# Altium PCB Power Board rev5.PcbDoc (part 2 of 2)
Units mil, origin at the board's own origin, x right, y up, seen from the top; angles counter-clockwise.
Board outline 3457.32 x 5639.92 mil, 2 copper layers (Top Layer, Bottom Layer); 95 components, 85 nets, 338 pads, 132 vias.
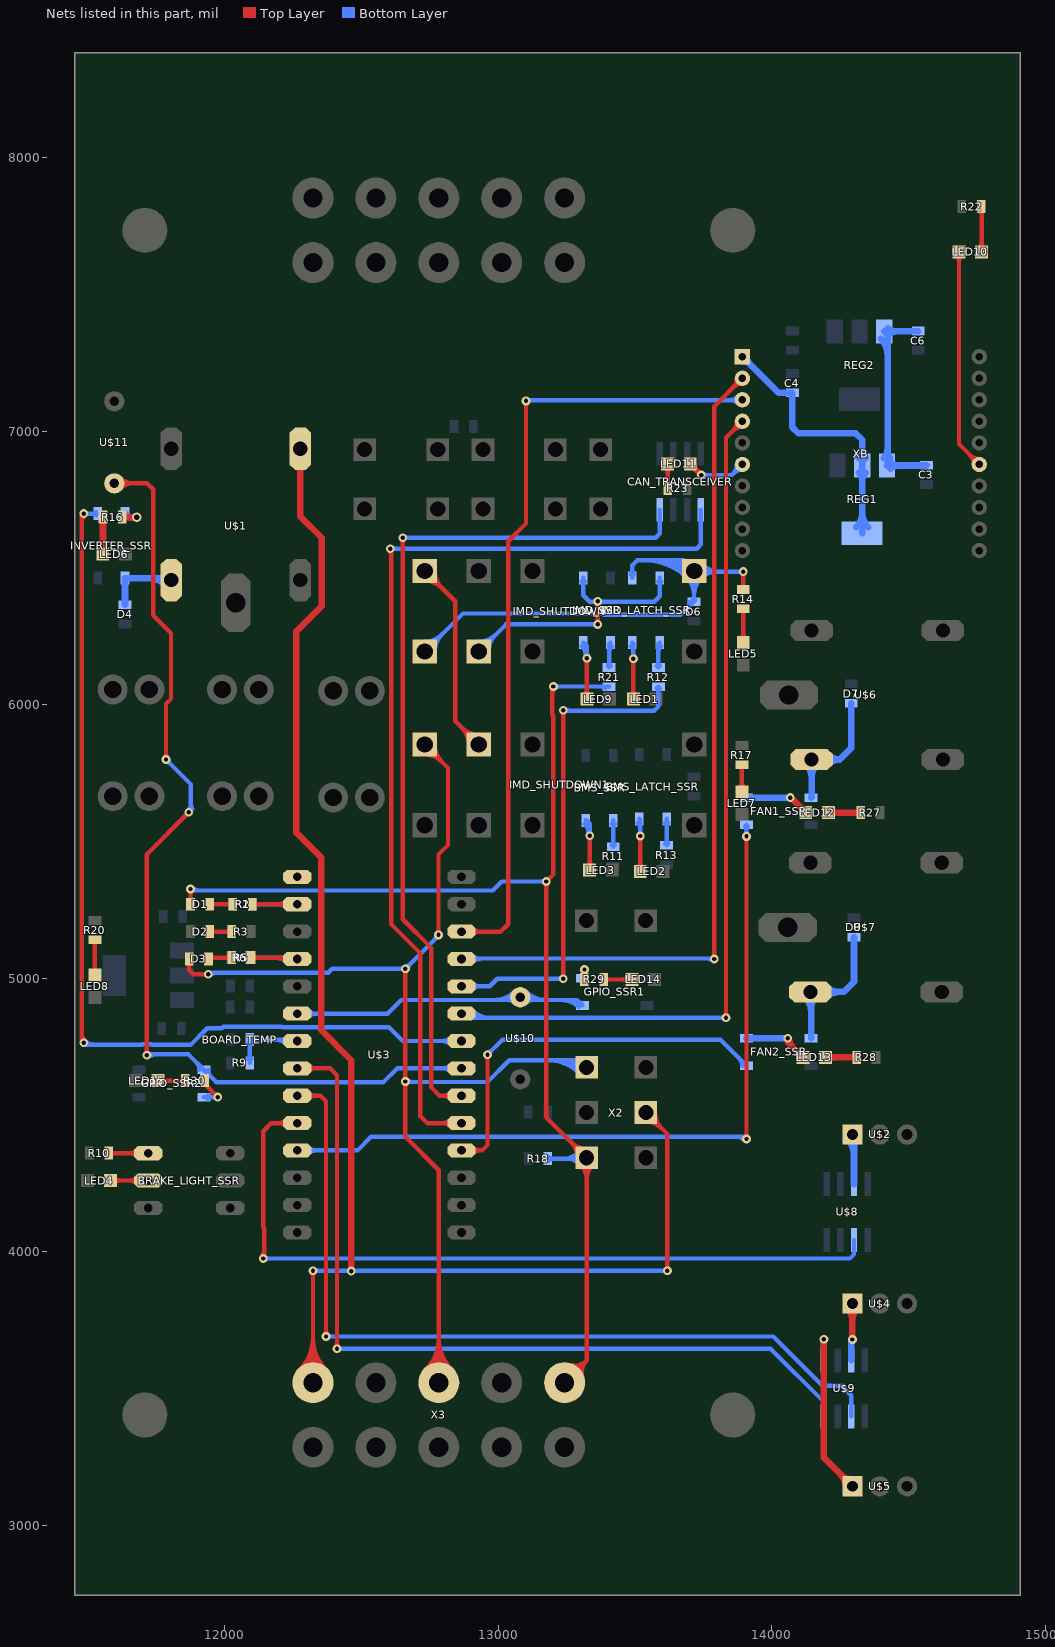
[diagram p2: the nets of this part, all layers, seen from the top]

## Via types
v1: diameter 32, hole 16, Top Layer to Bottom Layer, 87 vias
v2: diameter 40, hole 20, Top Layer to Bottom Layer, 41 vias
v3: diameter 35, hole 20, Top Layer to Bottom Layer, 4 vias

## Nets (pads, with @x,y where several pads share a name; then routed paths per layer and width w, separated by ;. In a path a pad name is that pad's centre, name@x,y a point inside that pad or via, vN(x,y) a via of type N, cw(c..) or ccw(c..) an arc to the next point about the centre after c; other vN are vias at no path point) (continued)
GPIO_CTRL1: GPIO_SSR1.1 U$3.A4 U$10.P$1 | length 1586.8
  Bottom Layer w16: U$3.A4@12265,4870 12595,4870 12645,4920 13286.89,4920 ; U$3.A4@12303.3,4857.45 cw(c12333.6,4827.15) 12333.6,4870 cw(c12333.6,4912.85) U$3.A4@12303.3,4882.55 ; 12985.85,4920 ccw(c12985.85,5024.15) U$10.P$1@13059.49,4950.51 ; 13024.47,4920 ccw(c13024.47,4985.53) U$10.P$1@13070.81,4939.19 ; 13034.13,4920 cw(c13034.13,4884.13) U$10.P$1@13059.49,4909.49 ; U$10.P$1@13089.19,4939.19 ccw(c13135.53,4985.53) 13135.53,4920 ; U$10.P$1@13100.51,4909.49 cw(c13125.87,4884.13) 13125.87,4920 ; U$10.P$1@13100.51,4950.51 ccw(c13174.15,5024.15) 13174.15,4920 ; 13232.03,4920 cw(c13232.03,4833.01) GPIO_SSR1.1@13293.54,4894.52 ; 13270.65,4920 cw(c13270.65,4871.64) GPIO_SSR1.1@13304.85,4905.84 ; GPIO_SSR1.1@13291.56,4902.1 ccw(c13273.96,4907.07) 13286.89,4920 ; GPIO_SSR1.1@13306.89,4900 13286.89,4920
GPIO_CTRL2: GPIO_SSR2.1 U$3.D5 U$11.P$1 | length 3991.3
  Top Layer w16: U$11.P$1@11595.95,6808.55 11716.45,6808.55 11738,6787 11738,6326 11803,6261 11803,6020.73 11785,6002.73 v1(11785,5799) ; U$11.P$1@11616.46,6788.04 cw(c11665.96,6738.54) 11665.96,6808.55 cw(c11665.96,6878.56) U$11.P$1@11616.46,6829.06 ; v1@11709.34,4723.66 ccw(c11695.69,4737.31) 11715,4737.31 ccw(c11734.31,4737.31) v1@11720.66,4723.66 ; v1(11715,4718) 11715,5453 v1(11868,5606) ; v1@11779.34,5804.66 ccw(c11765.69,5818.31) 11785,5818.31 ccw(c11804.31,5818.31) v1@11790.66,5804.66 ; v1@11868,5614 cw(c11848.69,5614) 11862.34,5600.34 cw(c11876,5586.69) v1@11876,5606
  Bottom Layer w16: v1(11715,4718) 11718,4721 11867.11,4721 GPIO_SSR2.1@11923.11,4665 11968.36,4619.75 12579.75,4619.75 12630,4670 U$3.D5@12865,4670 ; v1@11720.66,4712.34 cw(c11734.31,4698.69) 11734.31,4718 cw(c11734.31,4737.31) v1@11720.66,4723.66 ; v1@11785,5791 cw(c11785,5771.69) 11798.66,5785.34 cw(c11812.31,5799) v1@11793,5799 ; v1(11785,5799) 11876,5708 11876,5614 v1(11868,5606) ; v1@11870.34,5619.66 ccw(c11856.69,5633.31) 11876,5633.31 ccw(c11895.31,5633.31) 11881.66,5619.66 ; 11896.44,4691.67 cw(c11869.77,4665) GPIO_SSR2.1@11907.49,4665 ; GPIO_SSR2.1@11938.73,4665 ccw(c11976.45,4665) 11949.78,4638.33 ; U$3.D5@12826.7,4657.45 ccw(c12796.4,4627.15) 12796.4,4670 ccw(c12796.4,4712.85) U$3.D5@12826.7,4682.55
GPIO_CTRL3: U$3.D13
IMD_COIL_PWR: D6.C IMD_LATCH_SSR.3 IMD_SHUTDOWN.4 IMD_SHUTDOWN.COIL- R14.1 | length 3009.5
  Top Layer w16: v1@13889.34,6480.34 cw(c13875.69,6466.69) 13895,6466.69 cw(c13914.31,6466.69) v1@13900.66,6480.34 ; R14.1@13889.52,6425.91 ccw(c13876.29,6439.14) 13895,6439.14 ccw(c13913.71,6439.14) R14.1@13900.48,6425.91 ; R14.1@13895,6420.43 v1(13895,6486)
  Bottom Layer w16: IMD_SHUTDOWN.4@12730.95,6193.55 12870.4,6333 13379.57,6333 13384.57,6328 13665.13,6328 13712.56,6375.43 D6.C@13715,6375.43 13715,6487.6 IMD_SHUTDOWN.COIL-@13715.95,6488.55 ; IMD_SHUTDOWN.4@12730.95,6213.84 ccw(c12730.95,6262.83) 12765.59,6228.19 ccw(c12800.23,6193.55) IMD_SHUTDOWN.4@12751.24,6193.55 ; IMD_SHUTDOWN.4@12730.95,6229.84 ccw(c12730.95,6317.46) 12792.9,6255.5 ccw(c12854.86,6193.55) IMD_SHUTDOWN.4@12767.24,6193.55 ; IMD_LATCH_SSR.3@13484.52,6476.46 ccw(c13471.29,6489.69) 13490,6489.69 ccw(c13508.71,6489.69) IMD_LATCH_SSR.3@13495.48,6476.46 ; IMD_LATCH_SSR.3@13490,6463.11 13490,6509 13508,6527 13677.5,6527 IMD_SHUTDOWN.COIL-@13715.95,6488.55 ; 13535.51,6527 cw(c13535.51,6308.11) 13690.29,6462.89 cw(c13630.63,6403.23) 13715,6403.23 ; 13574.14,6527 cw(c13574.14,6346.74) 13701.6,6474.2 cw(c13669.26,6441.86) 13715,6441.86 ; 13612.76,6527 cw(c13612.76,6385.36) IMD_SHUTDOWN.COIL-@13712.92,6485.52 ; 13651.39,6527 cw(c13651.39,6423.99) IMD_SHUTDOWN.COIL-@13724.23,6496.83 ; 13690.06,6352.93 ccw(c13667.56,6375.43) D6.C@13699.38,6375.43 ; D6.C@13709.52,6380.91 ccw(c13696.29,6394.14) 13715,6394.14 ccw(c13733.71,6394.14) D6.C@13720.48,6380.91 ; 13715,6398.64 cw(c13805.86,6398.64) 13741.61,6462.89 cw(c13797.41,6407.09) 13797.41,6486 ; 13715,6437.27 cw(c13767.23,6437.27) IMD_SHUTDOWN.COIL-@13730.3,6474.2 ; IMD_SHUTDOWN.COIL-@13730.3,6502.9 ccw(c13771.09,6543.69) 13771.09,6486 ; IMD_SHUTDOWN.COIL-@13741.61,6514.21 ccw(c13809.72,6582.32) 13809.72,6486 ; v1@13889.34,6480.34 ccw(c13875.69,6466.69) 13875.69,6486 ccw(c13875.69,6505.31) v1@13889.34,6491.66 ; v1(13895,6486) 13718.5,6486 IMD_SHUTDOWN.COIL-@13715.95,6488.55
IMD_LATCH_CTRL: R12.2 U$3.D8(TX3) | length 2066.7
  Top Layer w16: v1@13231.34,5003.66 ccw(c13217.69,5017.31) 13237,5017.31 ccw(c13256.31,5017.31) v1@13242.66,5003.66 ; v1@13231.34,5973.34 cw(c13217.69,5959.69) 13237,5959.69 cw(c13256.31,5959.69) v1@13242.66,5973.34 ; v1(13237,4998) v1(13237,5979)
  Bottom Layer w16: 12865,4970 12968,4970 12996,4998 v1(13237,4998) ; 12903.3,4957.45 cw(c12933.6,4927.15) 12933.6,4970 cw(c12933.6,5012.85) 12903.3,4982.55 ; v1@13231.34,4992.34 ccw(c13217.69,4978.69) 13217.69,4998 ccw(c13217.69,5017.31) v1@13231.34,5003.66 ; v1(13237,5979) 13256,5979 ; v1@13242.66,5984.66 ccw(c13258.73,6000.73) 13258.73,5978 ; v1@13242.72,5973.41 cw(c13256,5960.44) 13256,5979 ; v1@13242.72,5984.59 ccw(c13256,5997.56) 13256,5979 ; v1@13242.99,5984.31 ccw(c13257,5996.72) 13257,5978 ; R12.2@13579.52,6059.09 cw(c13566.29,6045.86) 13585,6045.86 cw(c13603.71,6045.86) R12.2@13590.48,6059.09 ; R12.2@13585,6064.57 13585,5993 13570,5978 13257,5978 ; 13256,5979 13257,5978 ; v1@13242.66,5973.34 cw(c13253.9,5962.1) 13253.9,5978 ccw(c13253.9,5962.1) v1@13242.66,5973.34
IMD_PWR_STEP: IMD_LATCH_SSR.4 IMD_SHUTDOWN.3 IMD_SSR.3 | length 1413.7
  Top Layer w16: v1@13357.34,6298.66 ccw(c13343.69,6312.31) 13363,6312.31 ccw(c13382.31,6312.31) v1@13368.66,6298.66 ; v1@13357.34,6371.34 cw(c13343.69,6357.69) 13363,6357.69 cw(c13382.31,6357.69) v1@13368.66,6371.34 ; v1(13363,6293) v1(13363,6377)
  Bottom Layer w16: IMD_SHUTDOWN.3@12927.95,6193.55 13027.4,6293 v1(13363,6293) ; IMD_SHUTDOWN.3@12927.95,6213.84 ccw(c12927.95,6262.83) 12962.59,6228.19 ccw(c12997.23,6193.55) IMD_SHUTDOWN.3@12948.24,6193.55 ; IMD_SHUTDOWN.3@12927.95,6229.84 ccw(c12927.95,6317.46) 12989.9,6255.5 ccw(c13051.86,6193.55) IMD_SHUTDOWN.3@12964.24,6193.55 ; IMD_SSR.3@13304.52,6449.76 cw(c13291.29,6436.53) 13310,6436.53 cw(c13328.71,6436.53) IMD_SSR.3@13315.48,6449.76 ; IMD_SSR.3@13310,6463.11 13310,6400 13334,6376 13570,6376 13590,6396 IMD_LATCH_SSR.4@13590,6463.11 ; 13341.27,6376 ccw(c13341.27,6398.73) v1@13357.34,6382.66 ; 13346.1,6376 cw(c13346.1,6360.1) v1@13357.34,6371.34 ; v1@13357.34,6287.34 ccw(c13343.69,6273.69) 13343.69,6293 ccw(c13343.69,6312.31) v1@13357.34,6298.66 ; v1@13368.66,6371.34 cw(c13379.9,6360.1) 13379.9,6376 ; v1@13368.66,6382.66 ccw(c13384.73,6398.73) 13384.73,6376 ; IMD_LATCH_SSR.4@13584.52,6449.76 cw(c13571.29,6436.53) 13590,6436.53 cw(c13608.71,6436.53) IMD_LATCH_SSR.4@13595.48,6449.76
INVERTER_CTRL: INVERTER_SSR.1 U$3.D6 | length 3655.2
  Top Layer w16: 11477.38,4799.3 ccw(c11519.3,4799.3) v1@11489.66,4769.66 ; 11477.38,6662.7 cw(c11519.3,6662.7) v1@11489.66,6692.34 ; v1(11484,4764) 11477.38,4770.62 11477.38,6691.38 v1(11484,6698)
  Bottom Layer w16: v1(11484,4764) 11484,4757 11697.43,4757 11698.43,4758 11731.57,4758 11732.57,4757 11876,4757 11936,4817 11988.26,4817 11993.88,4822.62 12207.84,4822.62 12210.21,4820.25 12599.75,4820.25 12650,4770 U$3.D6@12865,4770 ; v1(11484,6698) 11484.11,6698.11 INVERTER_SSR.1@11535,6698.11 ; v1@11489.66,4769.66 ccw(c11520.21,4800.21) 11520.21,4757 ; v1@11489.66,6692.34 cw(c11503.58,6678.42) 11503.58,6698.11 ; v1@11489.66,6703.66 ccw(c11503.05,6717.05) 11503.05,6698.11 ; INVERTER_SSR.1@11529.52,6692.63 ccw(c11516.29,6679.4) 11516.29,6698.11 ccw(c11516.29,6716.82) INVERTER_SSR.1@11529.52,6703.59 ; U$3.D6@12826.7,4757.45 ccw(c12796.4,4727.15) 12796.4,4770 ccw(c12796.4,4812.85) U$3.D6@12826.7,4782.55
INVERTER_SUPPLY: U$1.S X2.5 X3.5 | length 6369.9
  Top Layer w16: X3.5@12274.67,3568.38 ccw(c12160.3,3682.75) 12322.05,3682.75 ccw(c12483.8,3682.75) X3.5@12369.43,3568.38 ; X3.5@12285.99,3557.06 ccw(c12198.93,3644.12) 12322.05,3644.12 ccw(c12445.17,3644.12) X3.5@12358.11,3557.06 ; X3.5@12297.3,3545.75 ccw(c12237.55,3605.5) 12322.05,3605.5 ccw(c12406.55,3605.5) X3.5@12346.8,3545.75 ; v1@12316.39,3924.39 cw(c12302.74,3910.74) 12322.05,3910.74 cw(c12341.36,3910.74) v1@12327.71,3924.39 ; X3.5@12322.05,3521 v1(12322.05,3930.05) ; X2.5@13539.22,4475.21 cw(c13539.22,4394.72) 13596.13,4451.64 cw(c13653.05,4508.55) X2.5@13572.56,4508.55 ; X2.5@13539.22,4491.21 cw(c13539.22,4449.35) 13568.82,4478.95 cw(c13598.42,4508.55) X2.5@13556.56,4508.55 ; X2.5@13539.22,4508.55 13617.95,4429.82 v1(13617.95,3930.05) ; v1@13612.29,3935.71 ccw(c13598.64,3949.36) 13617.95,3949.36 ccw(c13637.26,3949.36) v1@13623.61,3935.71
  Top Layer w24: U$1.S@12276,6935 12276,6688 12354,6610 12354,6360.33 12261,6267.33 12261,5532 12353,5440 12353,4809 12462,4700 v1(12462,3929)
  Bottom Layer w16: v1(12322.05,3930.05) v1(13617.95,3930.05) ; v1@12327.71,3924.39 cw(c12341.36,3910.74) 12341.36,3930.05 cw(c12341.36,3949.36) v1@12327.71,3935.71 ; v1@13612.29,3924.39 ccw(c13598.64,3910.74) 13598.64,3930.05 ccw(c13598.64,3949.36) v1@13612.29,3935.71
N$1: IMD_LATCH_SSR.2 LED1.A | length 352.8
  Top Layer w16: LED1.A@13482.62,6031.05 ccw(c13455.95,6057.71) 13493.66,6057.71 ccw(c13531.38,6057.71) LED1.A@13504.71,6031.05 ; v1@13488.01,6162.01 cw(c13474.35,6148.35) 13493.66,6148.35 cw(c13512.98,6148.35) v1@13499.32,6162.01 ; LED1.A@13493.66,6020 v1(13493.66,6167.66)
  Bottom Layer w16: IMD_LATCH_SSR.2@13484.52,6213.54 cw(c13462.45,6191.47) 13493.66,6191.47 ; v1@13488.01,6173.32 ccw(c13474.35,6186.98) 13493.66,6186.98 ccw(c13512.98,6186.98) v1@13499.32,6173.32 ; IMD_LATCH_SSR.2@13490,6226.89 13493.66,6223.23 v1(13493.66,6167.66)
N$2: CAN_TRANSCEIVER.4 U$3.D4(CANRX) | length 3337.8
  Top Layer w16: v1@12644.34,6604.34 cw(c12630.69,6590.69) 12650,6590.69 cw(c12669.31,6590.69) v1@12655.66,6604.34 ; v1(12650,6610) 12650,5215 12755,5110 12755,4600 12785,4570 12865,4570 ; 12826.7,4557.45 ccw(c12796.4,4527.15) 12796.4,4570 ccw(c12796.4,4612.85) 12826.7,4582.55
  Bottom Layer w16: v1(12650,6610) 12650.06,6609.94 13574.94,6609.94 13590,6625 CAN_TRANSCEIVER.4@13590,6712.64 ; v1@12655.66,6604.34 cw(c12669.17,6590.83) 12669.17,6609.94 ; v1@12655.66,6615.66 ccw(c12669.46,6629.46) 12669.46,6609.94
N$3: CAN_TRANSCEIVER.1 U$3.D3(CANTX) | length 3673.3
  Top Layer w16: v1@12599.34,6564.34 cw(c12576.03,6541.03) 12609,6541.03 ; v1(12605,6570) 12609,6566 12609,5196 12715,5090 12715,4495 12740,4470 12865,4470 ; 12826.7,4457.45 ccw(c12796.4,4427.15) 12796.4,4470 ccw(c12796.4,4512.85) 12826.7,4482.55
  Bottom Layer w16: v1(12605,6570) 13725,6570 13740,6585 CAN_TRANSCEIVER.1@13740,6712.64 ; v1@12610.66,6564.34 cw(c12624.31,6550.69) 12624.31,6570 cw(c12624.31,6589.31) v1@12610.66,6575.66
N$4: D7.C FAN1_SSR.3 U$6.2 | length 667.7
  Bottom Layer w24: U$6.2@14125.91,5779.91 cw(c14079.82,5733.82) 14145,5733.82 cw(c14210.18,5733.82) U$6.2@14164.09,5779.91 ; FAN1_SSR.3@14143.11,5660 14145,5661.89 U$6.2@14145,5799 14248,5799 ; U$6.2@14203.34,5780.16 cw(c14248,5736.66) 14248,5799 ; U$6.2@14203.34,5817.84 ccw(c14248,5861.34) 14248,5799 ; D7.C@14290,6004.57 14290,5841 14248,5799
N$5: IMD_LATCH_SSR.1 R12.1 | length 151
  Bottom Layer w16: R12.1@13579.52,6140.91 ccw(c13566.29,6154.14) 13585,6154.14 ccw(c13603.71,6154.14) R12.1@13590.48,6140.91 ; R12.1@13585,6135.43 13585,6221.89 IMD_LATCH_SSR.1@13590,6226.89 ; 13585,6188.24 cw(c13620.78,6188.24) IMD_LATCH_SSR.1@13595.48,6213.54
N$6: GPIO_SSR1.2 R29.1 | length 71.3
  Top Layer w16: R29.1@13314.57,4995 v1(13314.57,5031.57)
  Bottom Layer w16: GPIO_SSR1.2@13306.89,5000 13314.57,5007.68 v1(13314.57,5031.57)
N$7: BRAKE_LIGHT_SSR.2 LED4.A | length 266.2
  Top Layer w16: LED4.A@11581.34,4260 BRAKE_LIGHT_SSR.2@11720,4260 ; LED4.A@11592.38,4248.95 cw(c11619.05,4222.29) 11619.05,4260 cw(c11619.05,4297.71) LED4.A@11592.38,4271.05 ; BRAKE_LIGHT_SSR.2@11681.27,4247.27 ccw(c11650.54,4216.54) 11650.54,4260 ccw(c11650.54,4303.46) BRAKE_LIGHT_SSR.2@11681.27,4272.73
N$8: GPIO_SSR2.2 R30.1 | length 242.5
  Top Layer w16: R30.1@11925.43,4625 11925.43,4613.57 v1(11974,4565) ; R30.1@11933.18,4617.13 ccw(c11960.47,4617.13) 11941.17,4597.83 ; v1@11966,4565 ccw(c11946.69,4565) 11960.34,4578.66 ccw(c11974,4592.31) v1@11974,4573
  Bottom Layer w16: GPIO_SSR2.2@11923.11,4565 v1(11974,4565) ; GPIO_SSR2.2@11936.46,4559.52 cw(c11949.69,4546.29) 11949.69,4565 cw(c11949.69,4583.71) GPIO_SSR2.2@11936.46,4570.48 ; v1@11968.34,4559.34 ccw(c11954.69,4545.69) 11954.69,4565 ccw(c11954.69,4584.31) v1@11968.34,4570.66
N$9: BMS_SSR.2 LED3.A | length 408.9
  Top Layer w16: LED3.A@13322.62,5406.05 ccw(c13295.95,5432.71) 13333.66,5432.71 ccw(c13371.38,5432.71) LED3.A@13344.71,5406.05 ; v1@13328.01,5514.68 cw(c13314.35,5501.02) 13333.66,5501.02 cw(c13352.98,5501.02) v1@13339.32,5514.68 ; LED3.A@13333.66,5395 v1(13333.66,5520.34)
  Bottom Layer w16: BMS_SSR.2@13314.61,5563.45 cw(c13271.01,5518.46) v1@13333.66,5518.46 ; BMS_SSR.2@13320,5576.89 13333.66,5563.23 v1(13333.66,5520.34) ; BMS_SSR.2@13325.74,5574.94 cw(c13307.62,5556.24) BMS_SSR.2@13333.66,5556.24 ; v1@13326.73,5524.34 ccw(c13311.45,5533.16) 13328.5,5537.73 ; 13327.89,5540 ccw(c13348.15,5545.43) v1@13337.66,5527.27 ; v1@13328.01,5525.99 ccw(c13314.35,5539.65) 13333.66,5539.65 ccw(c13352.98,5539.65) v1@13339.32,5525.99
N$10: LED10.A XB.15 | length 943
  Top Layer w16: LED10.A@14672.62,7643.95 cw(c14645.95,7617.29) 14683.66,7617.29 cw(c14721.38,7617.29) LED10.A@14694.71,7643.95 ; LED10.A@14683.66,7655 14683.66,6952.25 XB.15@14758.03,6877.88 ; XB.15@14738.03,6877.88 ccw(c14689.75,6877.88) 14723.89,6912.02 ccw(c14758.03,6946.16) XB.15@14758.03,6897.88
N$11: LED10.C R22.2 | length 254
  Top Layer w16: LED10.C@14755.29,7666.05 ccw(c14728.62,7692.71) 14766.34,7692.71 ccw(c14804.05,7692.71) LED10.C@14777.39,7666.05 ; R22.2@14759.95,7806.65 cw(c14744.53,7791.23) 14766.34,7791.23 ; R22.2@14765.43,7820 14766.34,7819.09 LED10.C@14766.34,7655 ; 14766.34,7795.62 cw(c14781.94,7795.62) R22.2@14770.91,7806.65
N$12: BMS_LATCH_SSR.1 R13.2 | length 155.2
  Bottom Layer w16: R13.2@13609.52,5490.91 ccw(c13596.29,5504.14) 13615,5504.14 ccw(c13633.71,5504.14) R13.2@13620.48,5490.91 ; BMS_LATCH_SSR.1@13609.52,5568.54 cw(c13596.29,5555.31) 13615,5555.31 cw(c13633.71,5555.31) BMS_LATCH_SSR.1@13620.48,5568.54 ; R13.2@13615,5485.43 BMS_LATCH_SSR.1@13615,5581.89
N$13: LED14.A R29.2 | length 191.9
  Top Layer w16: R29.2@13385.43,4995 LED14.A@13488.66,4995 ; R29.2@13390.91,4989.52 cw(c13404.14,4976.29) 13404.14,4995 cw(c13404.14,5013.71) R29.2@13390.91,5000.48 ; LED14.A@13477.62,4983.95 ccw(c13450.95,4957.29) 13450.95,4995 ccw(c13450.95,5032.71) LED14.A@13477.62,5006.05
N$14: LED15.A R30.2 | length 186.9
  Top Layer w16: LED15.A@11756.34,4625 R30.2@11854.57,4625 ; LED15.A@11767.38,4613.95 cw(c11794.05,4587.29) 11794.05,4625 cw(c11794.05,4662.71) LED15.A@11767.38,4636.05 ; R30.2@11849.09,4619.52 ccw(c11835.86,4606.29) 11835.86,4625 ccw(c11835.86,4643.71) R30.2@11849.09,4630.48
N$15: BOARD_TEMP.2 R9.2 U$3.A5 | length 417.1
  Bottom Layer w16: R9.2@12084.95,4703.35 ccw(c12071.72,4716.58) 12090.43,4716.58 ccw(c12109.14,4716.58) R9.2@12095.91,4703.35 ; BOARD_TEMP.2@12084.95,4761.65 cw(c12071.72,4748.42) 12090.43,4748.42 cw(c12109.14,4748.42) BOARD_TEMP.2@12095.91,4761.65 ; R9.2@12090.43,4690 BOARD_TEMP.2@12090.43,4775 12260,4775 U$3.A5@12265,4770 ; BOARD_TEMP.2@12095.91,4769.52 cw(c12109.14,4756.29) 12109.14,4775 cw(c12109.14,4793.71) BOARD_TEMP.2@12095.91,4780.48 ; 12184.33,4775 cw(c12184.33,4715.08) U$3.A5@12226.7,4757.45 ; 12208.48,4775 ccw(c12208.48,4800.78) U$3.A5@12226.7,4782.55
N$16: BMS_LATCH_SSR.2 LED2.A | length 337.8
  Top Layer w16: LED2.A@13507.62,5401.05 ccw(c13480.95,5427.71) 13518.66,5427.71 ccw(c13556.38,5427.71) LED2.A@13529.71,5401.05 ; v1@13513.01,5514.01 cw(c13499.35,5500.35) 13518.66,5500.35 cw(c13537.98,5500.35) v1@13524.32,5514.01 ; LED2.A@13518.66,5390 v1(13518.66,5519.66)
  Bottom Layer w16: BMS_LATCH_SSR.2@13509.52,5568.54 cw(c13487.45,5546.47) 13518.66,5546.47 ; v1@13513.01,5525.32 ccw(c13499.35,5538.98) 13518.66,5538.98 ccw(c13537.98,5538.98) v1@13524.32,5525.32 ; BMS_LATCH_SSR.2@13515,5581.89 13518.66,5578.23 v1(13518.66,5519.66)
N$17: BRAKE_LIGHT_SSR.1 R10.1 | length 242.2
  Top Layer w16: R10.1@11575.43,4360 BRAKE_LIGHT_SSR.1@11720,4360 ; R10.1@11580.91,4354.52 cw(c11594.14,4341.29) 11594.14,4360 cw(c11594.14,4378.71) R10.1@11580.91,4365.48 ; BRAKE_LIGHT_SSR.1@11681.27,4347.27 ccw(c11650.54,4316.54) 11650.54,4360 ccw(c11650.54,4403.46) BRAKE_LIGHT_SSR.1@11681.27,4372.73
N$18: BMS_SSR.1 R11.1 | length 155.2
  Bottom Layer w16: R11.1@13414.52,5485.91 ccw(c13401.29,5499.14) 13420,5499.14 ccw(c13438.71,5499.14) R11.1@13425.48,5485.91 ; BMS_SSR.1@13414.52,5563.54 cw(c13401.29,5550.31) 13420,5550.31 cw(c13438.71,5550.31) BMS_SSR.1@13425.48,5563.54 ; R11.1@13420,5480.43 BMS_SSR.1@13420,5576.89
N$19: LED5.A R14.2 | length 211.9
  Top Layer w16: LED5.A@13883.95,6237.38 ccw(c13857.29,6264.05) 13895,6264.05 ccw(c13932.71,6264.05) LED5.A@13906.05,6237.38 ; R14.2@13889.52,6344.09 cw(c13876.29,6330.86) 13895,6330.86 cw(c13913.71,6330.86) R14.2@13900.48,6344.09 ; LED5.A@13895,6226.34 R14.2@13895,6349.57
N$20: D8.C FAN2_SSR.3 U$7.2 | length 712.7
  Bottom Layer w24: U$7.2@14121.54,4930.27 cw(c14069.46,4878.19) 14143.11,4878.19 ; FAN2_SSR.3@14143.11,4780 14143.11,4946.88 U$7.2@14140.63,4949.36 14262.36,4949.36 14300,4987 D8.C@14300,5149.57 ; 14143.11,4890.16 cw(c14199.83,4890.16) U$7.2@14159.72,4930.27 ; U$7.2@14198.72,4930.27 cw(c14244.81,4884.18) 14244.81,4949.36 cw(c14244.81,5014.54) U$7.2@14198.72,4968.45
N$21: U$5.1 U$9.5 | length 753.4
  Top Layer w24: v1(14190,3680) 14190,3246.39 U$5.1@14294.18,3142.21 ; U$5.1@14269.18,3142.21 ccw(c14208.82,3142.21) 14251.5,3184.89 ccw(c14294.18,3227.57) U$5.1@14294.18,3167.21
  Bottom Layer w24: U$9.5@14190,3602.36 v1(14190,3680)
N$22: D1.C R1.1 | length 142.9
  Top Layer w16: D1.C@11945.43,5270 R1.1@12029.57,5270 ; D1.C@11950.91,5264.52 cw(c11964.14,5251.29) 11964.14,5270 cw(c11964.14,5288.71) D1.C@11950.91,5275.48 ; R1.1@12024.09,5264.52 ccw(c12010.86,5251.29) 12010.86,5270 ccw(c12010.86,5288.71) R1.1@12024.09,5275.48
N$23: D2.C R3.1 | length 137.9
  Top Layer w16: D2.C@11945.43,5170 R3.1@12024.57,5170 ; D2.C@11950.91,5164.52 cw(c11964.14,5151.29) 11964.14,5170 cw(c11964.14,5188.71) D2.C@11950.91,5175.48 ; R3.1@12019.09,5164.52 ccw(c12005.86,5151.29) 12005.86,5170 ccw(c12005.86,5188.71) R3.1@12019.09,5175.48
N$24: D3.C R5.1 | length 130.9
  Top Layer w16: D3.C@11945.43,5075 R5.1@12024.57,5075 ; D3.C@11945.91,5083.35 ccw(c11966.07,5103.52) 11966.07,5075 ; R5.1@12019.09,5069.52 ccw(c12005.86,5056.29) 12005.86,5075 ccw(c12005.86,5093.71) R5.1@12019.09,5080.48
N$25: LED11.A XB.6 | length 513.7
  Top Layer w16: LED11.A@13701.34,6864.38 cw(c13701.34,6826.66) 13728.01,6853.33 cw(c13754.67,6880) LED11.A@13716.96,6880 ; LED11.A@13701.34,6880 v1(13742,6839.34) ; LED11.A@13717.13,6859.61 cw(c13698.73,6827.74) v1@13734.27,6837.27 ; LED11.A@13721.72,6864.21 ccw(c13753.6,6882.61) v1@13744.07,6847.07 ; 13725.45,6854.81 cw(c13716.88,6839.98) v1@13734,6839.54 ; 13726.53,6855.89 ccw(c13741.36,6864.45) v1@13741.8,6847.34 ; v1@13734,6839.34 ccw(c13714.69,6839.34) 13728.34,6852.99 ccw(c13742,6866.65) v1@13742,6847.34
  Bottom Layer w16: v1(13742,6839.34) 13853.35,6839.34 XB.6@13891.89,6877.88 ; v1@13747.66,6833.68 cw(c13761.31,6820.02) 13761.31,6839.34 cw(c13761.31,6858.65) v1@13747.66,6844.99 ; XB.6@13871.89,6877.88 cw(c13823.61,6877.88) 13857.75,6843.74 cw(c13891.89,6809.6) XB.6@13891.89,6857.88
N$26: D4.C INVERTER_SSR.3 U$1.1 | length 370.7
  Bottom Layer w24: D4.C@11635,6365.43 INVERTER_SSR.3@11635,6461.89 11797.11,6461.89 U$1.1@11804,6455 ; 11722.18,6461.89 cw(c11722.18,6373.18) U$1.1@11784.91,6435.91 ; 11755.45,6461.89 ccw(c11755.45,6503.55) U$1.1@11784.91,6474.09
N$27: INVERTER_SSR.2 R16.1 | length 122.1
  Top Layer w24: R16.1@11625.43,6685 v3(11678,6685)
  Bottom Layer w24: INVERTER_SSR.2@11635,6698.11 11648.11,6685 v3(11678,6685) ; INVERTER_SSR.2@11637.65,6692.89 ccw(c11656.69,6711.93) 11656.69,6685
N$28: LED6.A R16.2 | length 178.2
  Top Layer w24: LED6.A@11545.44,6558.22 ccw(c11523.41,6580.25) 11554.57,6580.25 ; LED6.A@11554.57,6550.91 R16.2@11554.57,6685 ; 11554.57,6575.87 ccw(c11579.53,6575.87) LED6.A@11561.88,6558.22
N$29: LED8.A R20.2 | length 128.2
  Top Layer w16: LED8.A@11525,5011.34 R20.2@11525,5139.57
N$30: U$2.1 U$8.7 | length 278.1
  Bottom Layer w24: U$2.1@14276.5,4410.6 cw(c14219.77,4353.87) 14300,4353.87 ; U$2.1@14294.18,4428.28 14300,4422.46 U$8.7@14300,4247.36 ; 14300,4381.98 cw(c14340.48,4381.98) U$2.1@14311.86,4410.6
N$31: IMD_SSR.1 R21.2 | length 151
  Bottom Layer w16: R21.2@13399.52,6140.91 ccw(c13386.29,6154.14) 13405,6154.14 ccw(c13423.71,6154.14) R21.2@13410.48,6140.91 ; R21.2@13405,6135.43 13405,6221.89 IMD_SSR.1@13410,6226.89 ; 13405,6188.24 cw(c13440.78,6188.24) IMD_SSR.1@13415.48,6213.54
N$32: LED7.A R17.2 | length 186.9
  Top Layer w16: LED7.A@13878.95,5692.38 ccw(c13852.29,5719.05) 13890,5719.05 ccw(c13927.71,5719.05) LED7.A@13901.05,5692.38 ; R17.2@13884.52,5774.09 cw(c13871.29,5760.86) 13890,5760.86 cw(c13908.71,5760.86) R17.2@13895.48,5774.09 ; LED7.A@13890,5681.34 R17.2@13890,5779.57
N$33: LED11.C R23.2 | length 179
  Top Layer w16: LED11.C@13607.61,6868.95 cw(c13578.75,6840.09) 13619.57,6840.09 ; R23.2@13614.09,6803.35 ccw(c13600.86,6816.58) 13619.57,6816.58 ccw(c13638.28,6816.58) R23.2@13625.05,6803.35 ; LED11.C@13618.66,6880 13619.57,6879.09 R23.2@13619.57,6790 ; 13619.57,6844.48 cw(c13654.18,6844.48) LED11.C@13629.71,6868.95
N$34: IMD_SSR.2 LED9.A | length 434.6
  Top Layer w16: LED9.A@13312.62,6031.05 ccw(c13285.95,6057.71) 13323.66,6057.71 ccw(c13361.38,6057.71) LED9.A@13334.71,6031.05 ; v1@13318.01,6164.01 cw(c13304.35,6150.35) 13323.66,6150.35 cw(c13342.98,6150.35) v1@13329.32,6164.01 ; LED9.A@13323.66,6020 v1(13323.66,6169.66)
  Bottom Layer w16: IMD_SSR.2@13304.56,6213.5 cw(c13259.47,6167.81) v1@13323.66,6167.81 ; IMD_SSR.2@13310,6226.89 13323.66,6213.23 v1(13323.66,6169.66) ; IMD_SSR.2@13315.8,6224.89 cw(c13297.23,6206.08) IMD_SSR.2@13323.66,6206.08 ; v1@13316.73,6173.66 ccw(c13301.43,6182.5) 13318.5,6187.07 ; 13317.9,6189.31 ccw(c13338.14,6194.73) v1@13327.66,6176.59 ; v1@13318.01,6175.32 ccw(c13304.35,6188.98) 13323.66,6188.98 ccw(c13342.98,6188.98) v1@13329.32,6175.32
N$35: C3.1 C6.2 REG1.3 REG2.3 | length 1031.6
  Bottom Layer w24: REG2.3@14398.16,7337.14 cw(c14338.65,7277.64) 14422.8,7277.64 ; REG1.3@14408.16,6900.88 ccw(c14372.8,6936.24) 14422.8,6936.24 ; 14422.8,6925.36 ccw(c14457.43,6925.36) REG1.3@14432.94,6900.88 ; REG2.3@14422.94,7351.62 cw(c14452.87,7321.69) 14452.87,7364.01 cw(c14452.87,7406.33) REG2.3@14422.94,7376.4 ; REG1.3@14432.94,6861.62 cw(c14462.87,6831.69) 14462.87,6874.01 cw(c14462.87,6916.33) REG1.3@14432.94,6886.4 ; C6.2@14535,7365.43 14533.58,7364.01 REG2.3@14410.55,7364.01 14422.8,7351.76 14422.8,6876.26 REG1.3@14420.55,6874.01 14563.58,6874.01 C3.1@14565,6875.43
N$36: LED13.C R28.1 | length 157.3
  Top Layer w24: LED13.C@14196.34,4710 R28.1@14309.57,4710 ; LED13.C@14204.56,4701.78 cw(c14224.4,4681.94) 14224.4,4710 cw(c14224.4,4738.06) LED13.C@14204.56,4718.22
N$37: LED12.C R27.1 | length 162.3
  Top Layer w24: LED12.C@14206.34,5605 R27.1@14324.57,5605 ; LED12.C@14214.56,5596.78 cw(c14234.4,5576.94) 14234.4,5605 cw(c14234.4,5633.06) LED12.C@14214.56,5613.22
N$38: FAN1_SSR.2 LED12.A | length 283.6
  Top Layer w24: v1(14067,5660) 14068.66,5660 LED12.A@14123.66,5605 ; LED12.A@14112.04,5605 ccw(c14083.98,5605) 14103.82,5624.84 ccw(c14123.66,5644.68) LED12.A@14123.66,5616.62
  Bottom Layer w24: FAN1_SSR.2@13906.89,5660 v1(14067,5660)
N$40: U$4.1 U$9.7 | length 323.2
  Top Layer w24: U$4.1@14276.5,3792.56 cw(c14233.82,3749.88) 14294.18,3749.88 cw(c14354.54,3749.88) U$4.1@14311.86,3792.56 ; v1(14294.18,3678.82) U$4.1@14294.18,3810.24
  Bottom Layer w24: U$9.7@14290,3602.36 14290,3674.64 v1(14294.18,3678.82) ; 14290,3659.07 cw(c14313.93,3659.07) v1@14297.01,3675.99
N$42: FAN2_SSR.2 LED13.A | length 323
  Top Layer w24: v1(14058,4780) 14058,4765.66 LED13.A@14113.66,4710 ; v1@14062,4780 ccw(c14106.27,4780) 14074.97,4748.7 ; LED13.A@14102.04,4710 ccw(c14073.98,4710) 14093.82,4729.84 ccw(c14113.66,4749.68) LED13.A@14113.66,4721.62
  Bottom Layer w24: FAN2_SSR.2@13906.89,4780 v1(14058,4780)
OKHS: D1.A R18.1 R21.1 X2.1 X3.1 | length 5447.8
  Top Layer w16: v1@11868.9,5319.9 cw(c11855.25,5306.25) 11874.56,5306.25 cw(c11893.87,5306.25) v1@11880.22,5319.9 ; D1.A@11869.08,5283.35 ccw(c11855.85,5296.58) 11874.56,5296.58 ccw(c11893.27,5296.58) D1.A@11880.04,5283.35 ; D1.A@11874.56,5270 v1(11874.56,5325.56) ; v1@13169.34,5347.34 cw(c13155.69,5333.69) 13175,5333.69 cw(c13194.31,5333.69) v1@13180.66,5347.34 ; v1@13175,5361 ccw(c13175,5380.31) 13188.66,5366.66 ccw(c13202.31,5353) v1@13183,5353 ; 13197,6037.03 cw(c13229.97,6037.03) v1@13206.66,6060.34 ; v1(13201,6066) 13197,6062 13197,5962.43 13201,5958.43 13201,5379 v1(13175,5353) 13175,4490.88 X2.1@13322.68,4343.2 13322.68,3601.63 ; X3.1@13242.05,3521 13322.68,3601.63 ; X3.1@13256,3570.05 ccw(c13269.23,3616.56) 13303.42,3582.37 ccw(c13337.61,3548.18) X3.1@13291.1,3534.95 ; X3.1@13260.38,3585.44 ccw(c13277.76,3646.55) 13322.68,3601.63 ; X2.1@13289.34,4343.2 ccw(c13208.85,4343.2) 13265.77,4400.11 ccw(c13322.68,4457.03) X2.1@13322.68,4376.54 ; X2.1@13299.11,4319.63 cw(c13242.19,4262.71) 13322.68,4262.71 cw(c13403.17,4262.71) X2.1@13346.25,4319.63 ; X2.1@13305.34,4343.2 ccw(c13263.48,4343.2) 13293.08,4372.8 ccw(c13322.68,4402.4) X2.1@13322.68,4360.54 ; X3.1@13306.49,3539.33 cw(c13367.6,3556.71) 13322.68,3601.63 ; X2.1@13310.42,4330.94 cw(c13280.82,4301.34) 13322.68,4301.34 cw(c13364.54,4301.34) X2.1@13334.94,4330.94
  Bottom Layer w16: v1(11874.56,5325.56) 11879.87,5320.25 12979.25,5320.25 13012,5353 v1(13175,5353) ; v1@11880.22,5331.22 ccw(c11906.69,5357.69) 11906.69,5320.25 ; v1@13169.34,5347.34 ccw(c13155.69,5333.69) 13155.69,5353 ccw(c13155.69,5372.31) v1@13169.34,5358.66 ; R18.1@13180.43,4340 13319.48,4340 X2.1@13322.68,4343.2 ; R18.1@13185.91,4334.52 cw(c13199.14,4321.29) 13199.14,4340 cw(c13199.14,4358.71) R18.1@13185.91,4345.48 ; v1(13201,6066) 13403.57,6066 R21.1@13405,6064.57 ; v1@13206.66,6060.34 cw(c13220.31,6046.69) 13220.31,6066 cw(c13220.31,6085.31) v1@13206.66,6071.66 ; 13234.47,4340 ccw(c13234.47,4431.41) X2.1@13299.11,4366.77 ; 13249.92,4340 cw(c13249.92,4270.44) X2.1@13299.11,4319.63 ; 13273.1,4340 ccw(c13273.1,4392.78) X2.1@13310.42,4355.46 ; 13374.97,6066 cw(c13374.97,6042.41) R21.1@13391.65,6059.09
OKHS_READ: R1.2 R2.1 U$3.A0 | length 522.5
  Top Layer w16: R1.2@12100.43,5270 U$3.A0@12265,5270 ; R1.2@12105.91,5264.52 cw(c12119.14,5251.29) 12119.14,5270 cw(c12119.14,5288.71) R1.2@12105.91,5275.48 ; U$3.A0@12226.7,5257.45 ccw(c12196.4,5227.15) 12196.4,5270 ccw(c12196.4,5312.85) U$3.A0@12226.7,5282.55
  Bottom Layer w16: R2.1@12100.43,5270 U$3.A0@12265,5270 ; R2.1@12105.91,5264.52 cw(c12119.14,5251.29) 12119.14,5270 cw(c12119.14,5288.71) R2.1@12105.91,5275.48 ; U$3.A0@12226.7,5257.45 ccw(c12196.4,5227.15) 12196.4,5270 ccw(c12196.4,5312.85) U$3.A0@12226.7,5282.55
PWM_CTRL1: U$3.A8 U$8.2 | length 2952.6
  Top Layer w16: v1@12134.34,3980.66 ccw(c12120.69,3994.31) 12140,3994.31 ccw(c12159.31,3994.31) v1@12145.66,3980.66 ; v1(12140,3975) 12144,3979 12144,4084.57 12140,4088.57 12140,4440 12170,4470 U$3.A8@12265,4470 ; U$3.A8@12226.7,4457.45 ccw(c12196.4,4427.15) 12196.4,4470 ccw(c12196.4,4512.85) U$3.A8@12226.7,4482.55
  Bottom Layer w16: v1(12140,3975) 14285,3975 14300,3990 U$8.2@14300,4042.64 ; v1@12145.66,3969.34 cw(c12159.31,3955.69) 12159.31,3975 cw(c12159.31,3994.31) v1@12145.66,3980.66
PWM_CTRL2: U$3.A7 U$9.2 | length 3187.7
  Top Layer w16: U$3.A7@12265,4570 12350,4570 12370,4550 v1(12370,3690) ; U$3.A7@12303.3,4557.45 cw(c12333.6,4527.15) 12333.6,4570 cw(c12333.6,4612.85) U$3.A7@12303.3,4582.55 ; v1@12364.34,3695.66 ccw(c12350.69,3709.31) 12370,3709.31 ccw(c12389.31,3709.31) v1@12375.66,3695.66
  Bottom Layer w16: v1(12370,3690) 14005,3690 14185,3510 14255,3510 14290,3475 U$9.2@14290,3397.64 ; v1@12375.66,3684.34 cw(c12389.31,3670.69) 12389.31,3690 cw(c12389.31,3709.31) v1@12375.66,3695.66
PWM_CTRL3: U$3.A6 U$9.4 | length 3196.5
  Top Layer w16: U$3.A6@12265,4670 12385,4670 12410,4645 v1(12410,3645) ; U$3.A6@12303.3,4657.45 cw(c12333.6,4627.15) 12333.6,4670 cw(c12333.6,4712.85) U$3.A6@12303.3,4682.55 ; v1@12404.34,3650.66 ccw(c12390.69,3664.31) 12410,3664.31 ccw(c12429.31,3664.31) v1@12415.66,3650.66
  Bottom Layer w16: v1(12410,3645) 13995,3645 14190,3450 U$9.4@14190,3397.64 ; v1@12415.66,3639.34 cw(c12429.31,3625.69) 12429.31,3645 cw(c12429.31,3664.31) v1@12415.66,3650.66
RELAY_CTRL1: FAN1_SSR.1 U$3.A9 | length 3037.8
  Top Layer w16: v1@13901.23,4417.55 ccw(c13887.58,4431.2) 13906.89,4431.2 ccw(c13926.2,4431.2) v1@13912.55,4417.55 ; v1@13901.23,5512.45 cw(c13887.58,5498.8) 13906.89,5498.8 cw(c13926.2,5498.8) v1@13912.55,5512.45 ; v1(13906.89,4411.89) v1(13906.89,5518.11)
  Bottom Layer w16: U$3.A9@12265,4370 12485,4370 12534.75,4419.75 13899.03,4419.75 v1(13906.89,4411.89) ; U$3.A9@12303.3,4357.45 cw(c12333.6,4327.15) 12333.6,4370 cw(c12333.6,4412.85) U$3.A9@12303.3,4382.55 ; 13868.61,4419.75 cw(c13868.61,4373.61) v1@13901.23,4406.23 ; v1@13901.23,5523.77 ccw(c13887.58,5537.42) 13906.89,5537.42 ccw(c13926.2,5537.42) v1@13912.55,5523.77 ; FAN1_SSR.1@13901.41,5554.52 cw(c13888.18,5541.29) 13906.89,5541.29 cw(c13925.6,5541.29) FAN1_SSR.1@13912.37,5554.52 ; v1(13906.89,5518.11) FAN1_SSR.1@13906.89,5560
RELAY_CTRL2: FAN2_SSR.1 U$3.D2 | length 1600.1
  Top Layer w16: U$3.D2@12865,4370 12940,4370 12960,4390 v1(12960,4720.25) ; U$3.D2@12903.3,4357.45 cw(c12933.6,4327.15) 12933.6,4370 cw(c12933.6,4412.85) U$3.D2@12903.3,4382.55 ; v1@12954.34,4714.6 cw(c12940.69,4700.94) 12960,4700.94 cw(c12979.31,4700.94) v1@12965.66,4714.6
  Bottom Layer w16: v1(12960,4720.25) 13014.75,4775 13811.89,4775 FAN2_SSR.1@13906.89,4680 ; v1@12960,4728.25 ccw(c12960,4747.57) 12973.66,4733.91 ccw(c12987.31,4720.25) v1@12968,4720.25 ; 13880.22,4706.67 cw(c13853.55,4680) FAN2_SSR.1@13891.27,4680
SHUTDOWN_A: IMD_SHUTDOWN1.6 IMD_SHUTDOWN.5 | length 1145.7
  Top Layer w16: IMD_SHUTDOWN.5@12730.95,6452.26 cw(c12730.95,6364.64) 12792.9,6426.6 cw(c12854.86,6488.55) IMD_SHUTDOWN.5@12767.24,6488.55 ; IMD_SHUTDOWN.5@12730.95,6468.26 cw(c12730.95,6419.27) 12765.59,6453.91 cw(c12800.23,6488.55) IMD_SHUTDOWN.5@12751.24,6488.55 ; IMD_SHUTDOWN.5@12730.95,6488.55 12842,6377.5 12842,5939.5 IMD_SHUTDOWN1.6@12927.95,5853.55 ; IMD_SHUTDOWN1.6@12891.66,5853.55 ccw(c12804.04,5853.55) 12866,5915.5 ccw(c12927.95,5977.46) IMD_SHUTDOWN1.6@12927.95,5889.84 ; IMD_SHUTDOWN1.6@12907.66,5853.55 ccw(c12858.67,5853.55) 12893.31,5888.19 ccw(c12927.95,5922.83) IMD_SHUTDOWN1.6@12927.95,5873.84
SHUTDOWN_B: D3.A IMD_SHUTDOWN1.5 X2.3 X3.3 | length 5453.5
  Top Layer w16: D3.A@11864.08,5056.65 cw(c11850.85,5043.42) 11869.56,5043.42 cw(c11888.27,5043.42) D3.A@11875.04,5056.65 ; D3.A@11869.56,5070 11869.56,5028.44 11884,5014 v1(11939,5014) ; v1@11933.34,5008.34 ccw(c11919.69,4994.69) 11919.69,5014 ccw(c11919.69,5033.31) v1@11933.34,5019.66 ; v1@12654.34,4616.34 cw(c12640.69,4602.69) 12660,4602.69 cw(c12679.31,4602.69) v1@12665.66,4616.34 ; v1@12654.34,4627.66 ccw(c12640.69,4641.31) 12660,4641.31 ccw(c12679.31,4641.31) v1@12665.66,4627.66 ; v1@12654.34,5028.34 cw(c12640.69,5014.69) 12660,5014.69 cw(c12679.31,5014.69) v1@12665.66,5028.34 ; v1(12660,5034) v1(12660,4622) 12660,4420 12782.05,4297.95 X3.3@12782.05,3521 ; IMD_SHUTDOWN1.5@12730.95,5817.26 cw(c12730.95,5729.64) 12792.9,5791.6 cw(c12854.86,5853.55) IMD_SHUTDOWN1.5@12767.24,5853.55 ; IMD_SHUTDOWN1.5@12730.95,5833.26 cw(c12730.95,5784.27) 12765.59,5818.91 cw(c12800.23,5853.55) IMD_SHUTDOWN1.5@12751.24,5853.55 ; IMD_SHUTDOWN1.5@12730.95,5853.55 12816,5768.5 12816,5487 12781,5452 v1(12781,5158) ; X3.3@12734.67,3568.38 ccw(c12620.3,3682.75) 12782.05,3682.75 ccw(c12943.8,3682.75) X3.3@12829.43,3568.38 ; X3.3@12745.99,3557.06 ccw(c12658.93,3644.12) 12782.05,3644.12 ccw(c12905.17,3644.12) X3.3@12818.11,3557.06 ; X3.3@12757.3,3545.75 ccw(c12697.55,3605.5) 12782.05,3605.5 ccw(c12866.55,3605.5) X3.3@12806.8,3545.75 ; v1@12775.34,5163.66 ccw(c12761.69,5177.31) 12781,5177.31 ccw(c12800.31,5177.31) v1@12786.66,5163.66
  Bottom Layer w16: v1(11939,5014) 11945,5020 12378,5020 12392,5034 v1(12660,5034) 12781,5155 v1(12781,5158) ; v1@11944.66,5008.34 cw(c11972.8,4980.2) 11972.8,5020 ; v1@12654.34,5028.34 ccw(c12640.69,5014.69) 12640.69,5034 ccw(c12640.69,5053.31) v1@12654.34,5039.66 ; v1(12660,4622) 12661.75,4620.25 12960.25,4620.25 13040,4700 13296.59,4700 X2.3@13322.68,4673.91 ; v1@12660,5042 ccw(c12660,5061.31) 12673.66,5047.66 ccw(c12687.31,5034) v1@12668,5034 ; v1@12665.66,4627.66 ccw(c12683.53,4645.53) 12683.53,4620.25 ; 12765.22,5139.22 ccw(c12746.44,5158) v1@12773,5158 ; 13179.21,4700 cw(c13179.21,4530.44) X2.3@13299.11,4650.34 ; 13217.83,4700 cw(c13217.83,4569.06) X2.3@13310.42,4661.65 ; 13256.46,4700 cw(c13256.46,4607.69) X2.3@13321.73,4672.96
SHUTDOWN_OUT_READ: R5.2 R6.1 U$3.A2 | length 541.7
  Top Layer w16: R5.2@12095.43,5075 12260,5075 U$3.A2@12265,5070 ; R5.2@12100.91,5069.52 cw(c12114.14,5056.29) 12114.14,5075 cw(c12114.14,5093.71) R5.2@12100.91,5080.48 ; 12184.33,5075 cw(c12184.33,5015.08) U$3.A2@12226.7,5057.45 ; 12208.48,5075 ccw(c12208.48,5100.78) U$3.A2@12226.7,5082.55
  Bottom Layer w16: R6.1@12090.43,5075 12260,5075 U$3.A2@12265,5070 ; R6.1@12095.91,5069.52 cw(c12109.14,5056.29) 12109.14,5075 cw(c12109.14,5093.71) R6.1@12095.91,5080.48 ; 12184.33,5075 cw(c12184.33,5015.08) U$3.A2@12226.7,5057.45 ; 12208.48,5075 ccw(c12208.48,5100.78) U$3.A2@12226.7,5082.55
VCC: C4.2 REG1.2 REG1.4 XB.1 | length 1292.4
  Bottom Layer w24: XB.1@13891.89,7255.58 cw(c13891.89,7215.85) 13919.98,7243.94 ; XB.1@13891.89,7271.58 13892.35,7271.58 14024.36,7139.57 C4.2@14075,7139.57 14075,7013 14096,6992 14306,6992 14330,6968 REG1.2@14330,6874.01 REG1.4@14330,6625.98 ; XB.1@13907.89,7271.58 ccw(c13945.42,7271.58) XB.1@13918.88,7245.04 ; REG1.4@14307.86,6648.12 ccw(c14254.42,6701.56) 14330,6701.56 ccw(c14405.58,6701.56) REG1.4@14352.14,6648.12 ; REG1.2@14317.61,6847.14 cw(c14287.68,6817.22) 14330,6817.22 cw(c14372.32,6817.22) REG1.2@14342.39,6847.14 ; REG1.2@14317.61,6900.88 ccw(c14287.68,6930.8) 14330,6930.8 ccw(c14372.32,6930.8) REG1.2@14342.39,6900.88
XB8: U$3.D7(RX3) XB.4 | length 3432.3
  Top Layer w16: v1@13826.34,4860.66 ccw(c13812.69,4874.31) 13832,4874.31 ccw(c13851.31,4874.31) v1@13837.66,4860.66 ; v1(13832,4855) 13832,6975.47 XB.4@13891.89,7035.36 ; XB.4@13871.89,7035.36 cw(c13823.61,7035.36) 13857.75,7001.22 cw(c13891.89,6967.08) XB.4@13891.89,7015.36
  Bottom Layer w16: 12865,4870 12880,4855 v1(13832,4855) ; 12891.98,4871.24 ccw(c12931.18,4910.43) 12931.18,4855 ; 12903.3,4882.55 ccw(c12969.81,4949.06) 12969.81,4855 ; v1@13826.34,4849.34 ccw(c13812.69,4835.69) 13812.69,4855 ccw(c13812.69,4874.31) v1@13826.34,4860.66
XBDI: U$3.D10(TX2) XB.3 | length 3111.4
  Top Layer w16: 12865,5170 13009,5170 13036,5197 13036,6597 13101,6662 v1(13101,7110) ; 12903.3,5157.45 cw(c12933.6,5127.15) 12933.6,5170 cw(c12933.6,5212.85) 12903.3,5182.55 ; v1@13095.34,7104.34 cw(c13081.69,7090.69) 13101,7090.69 cw(c13120.31,7090.69) v1@13106.66,7104.34
  Bottom Layer w16: v1(13101,7110) 13104,7113 13890.79,7113 XB.3@13891.89,7114.1 ; v1@13106.66,7104.34 cw(c13127.56,7083.44) 13127.56,7113 ; 13840.95,7113 ccw(c13840.95,7165.04) XB.3@13877.75,7128.24 ; 13846.26,7113 cw(c13846.26,7068.47) XB.3@13877.75,7099.96
XBDO: U$3.D9(RX2) XB.2 | length 3294.6
  Top Layer w16: v1@13783.34,5075.66 ccw(c13769.69,5089.31) 13789,5089.31 ccw(c13808.31,5089.31) v1@13794.66,5075.66 ; v1(13789,5070) 13789,7089.95 XB.2@13891.89,7192.84 ; XB.2@13871.89,7192.84 cw(c13823.61,7192.84) 13857.75,7158.7 cw(c13891.89,7124.56) XB.2@13891.89,7172.84
  Bottom Layer w16: 12865,5070 12866.57,5071.57 13787.43,5071.57 v1(13789,5070) ; 12903.3,5057.45 cw(c12933.6,5027.15) 12933.6,5070 cw(c12933.6,5112.85) 12903.3,5082.55 ; v1@13783.34,5064.34 ccw(c13769.69,5050.69) 13769.69,5070 ccw(c13769.69,5089.31) v1@13783.34,5075.66
pads on no net: BRAKE_LIGHT_SSR.3 BRAKE_LIGHT_SSR.4 CAN_TRANSCEIVER.5 IMD_SHUTDOWN1.2 IMD_SHUTDOWN1.7 IMD_SHUTDOWN.2 IMD_SHUTDOWN.7 U$1.O U$3.3.3V U$3.D0(RX1) U$3.D1(TX1) U$6.O U$7.O U$8.1 U$8.4 U$8.5 U$8.8 U$9.1 U$9.8 X3. X4. XB.5 XB.7 XB.8 XB.9 XB.11 XB.12 XB.13 XB.14 XB.16 XB.17 XB.18 XB.19 XB.20
copper on no net:
  other v2: 12060,5371

## Polygon pours and split planes (outlines as drawn)
GND on Top Layer "Top Layer-GND" (hatched 90Degree grid 10 track 10, remove dead copper, pour order 2): 11390,8688 11390,3813 13840,3813 14013,3813 14013,4584 14013,4600 14438,4600 14438,6412 15006,6412 15006,8720 14124,8720 14124,7334 11902,7334 11398,7334 11398,8208
GND1 on Top Layer "Top Layer-GND1" (hatched 90Degree grid 10 track 10, remove dead copper, pour order 4): 12334,3362 12227,3362 12191,3326 12191,2674 12200,2665 14935,2665 14969,2699 14969,5893 14940,5922 14570,5922 14541,5893 14541,4594 14482,4535 14467,4520 14467,4111 14467,2950 14415,2898 12443,2898 12418,2923 12409,2932 12409,3290 12409,3343 12395,3357 12390,3362 12336,3362
GND1 on Bottom Layer "Bottom Layer-GND1" (hatched 90Degree grid 10 track 10, remove dead copper, pour order 6): 12334,3362 12227,3362 12191,3326 12191,2674 12200,2665 14935,2665 14969,2699 14969,5893 14940,5922 14570,5922 14541,5893 14541,4594 14482,4535 14467,4520 14467,4111 14467,2950 14415,2898 12443,2898 12418,2923 12409,2932 12409,3290 12409,3343 12395,3357 12390,3362 12336,3362
GND on Bottom Layer "Bottom Layer-GND" (hatched 90Degree grid 10 track 10, remove dead copper, pour order 8): 11390,8688 11390,3813 13840,3813 14013,3813 14013,4584 14013,4600 14438,4600 14438,6412 15006,6412 15006,8720 14124,8720 14124,7334 11902,7334 11398,7334 11398,8208

## Keep-outs
Keep-Out Layer:
  the board outline again, w0.31

## Silkscreen, mask and mechanical layers (free items; w line width, h text height)
Top Overlay:
  drawing of 2150 lines, arcs and shapes, not listed
  text "FH Fuse" at 11556,5347 h40
  text "rear_ecu_rev5" at 12260,3810 h40
  text "HyTech 2017" at 13170,3715 h40
  text "BMS LATCH" at 11870,3700 h40
  text "IMD LATCH" at 12365,3700 h40
  text "BMS" at 12870,3700 h40

## Text inside footprints (layer, text, board x,y; h text height)
FH_FUSE: Top Overlay "Mini-Blade" at 11520,6225 h40
FUSE_BUS_1: Top Overlay "Mini-Blade" at 12300,6230 h40
FUSE_BUS_2: Top Overlay "Mini-Blade" at 11885,6230 h40
U$3: Top Overlay "Teensy 3.2" at 12369.05,4796.45 h40